# EAGLE board RTC (EAGLE 9.6.1)
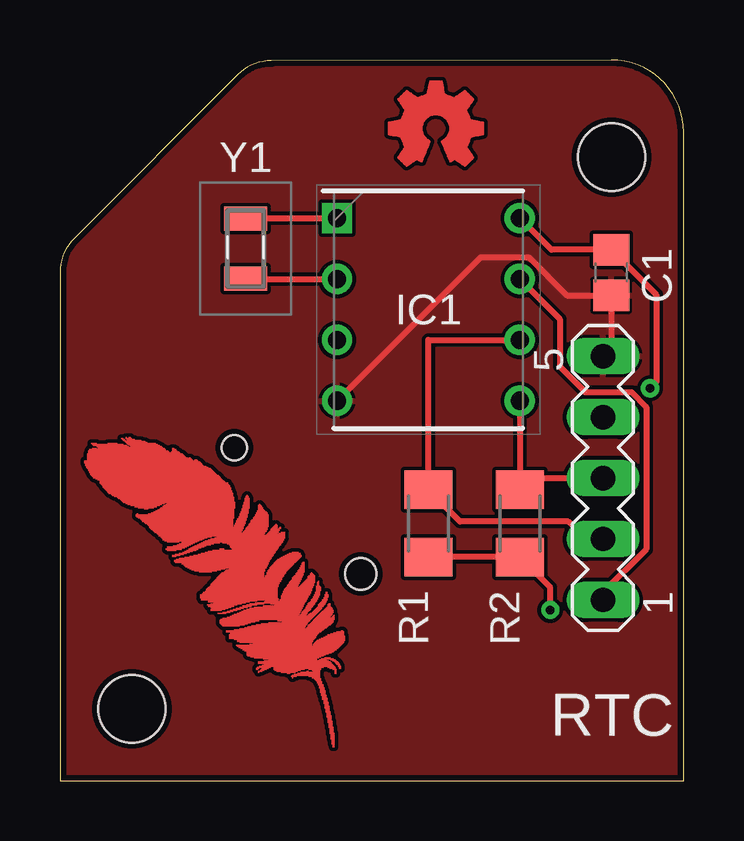
[diagram p0: board, top side]
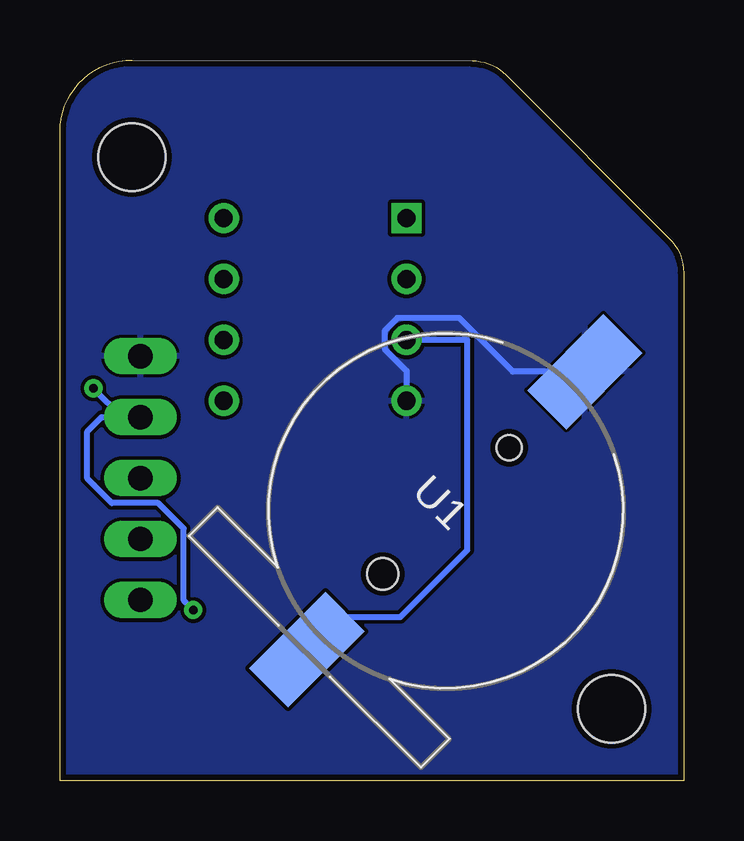
[diagram p1: board, bottom side, seen from below]

Size 26 x 30.05 mm. Coordinates in mm from the lower left corner, seen from the top.
Outline: 26,0 26,27.05 arc90 22.99,30.05 8.81,30.02 arc45 7.4,29.43 0.58,22.6 arc45 0,21.19 0,0 26,0
Copper layers (1*16): Top 0.035mm / dielectric 1.5mm / Bottom 0.035mm
Design rules "default *": minimum track width 6mil, minimum drill 0.35mm, track to track 6mil, track to pad 6mil, pad to pad 6mil, via to via 6mil, smd to smd 6mil, copper to edge 10mil, drill to drill 6mil, minimum pad ring 10mil, minimum via ring 8mil, stop-mask expansion 4mil, vias tented up to drill 0mil, thermal gap 5mil
Holes 2.8 mm at 23,26 3,3

## Footprints (pad centres in the part's own frame; a part is rotated, then mirrored left to right if it is on the bottom)
C0805 = smd 1.3 x 1.5: 1 -0.95,0; 2 0.95,0
DIP762W56P254L938H457Q8N = drill 0.76 pad 1.16 square: 1 -3.81,3.81 | drill 0.76 pad 1.16: 2 -3.81,1.27; 3 -3.81,-1.27; 4 -3.81,-3.81; 5 3.81,-3.81; 6 3.81,-1.27; 7 3.81,1.27; 8 3.81,3.81
M1206 = smd 1.6 x 2: 1 -1.4,0; 2 1.4,0
MA05-1 = drill 1.016 long: 1 -5.08,0; 2 -2.54,0; 3 0,0; 4 2.54,0; 5 5.08,0
S8411-45R_1 = smd 2.3 x 4.5: 1 0,-8.2; 2 0,8.2 | hole 1.3: 0,-3.725 | hole 1.05: 0,3.725
CM7VT1A32768KHZ125PF10PPMTBQC = smd 1 x 1.8: 1 -1.25,0; 2 1.25,0

## Placement (x,y rotation side)
C1  0.1uF  [C0805]  22.98,21.19 90 top
IC1  DS1307N+  [DIP762W56P254L938H457Q8N]  15.36,19.65 0 top
R1  2.2K  [M1206]  15.36,10.73 90 top
R2  2.2K  [M1206]  19.17,10.73 90 top
SV1  [MA05-1]  22.64,12.62 90 top
U1  S8411-45R  [S8411-45R_1]  9.91,11.26 315 bottom
Y1  CM7V-T1A-32.768K-9PF-20PPM-TA-  [CM7VT1A32768KHZ125PF10PPMTBQC]  7.74,22.19 90 top

## Library data of the parts
C1 = rcl; SPICEPREFIX: C
IC1 = MouserUseful; DESCRIPTION: 64 x 8, Serial, I2C Real-Time Clock; HEIGHT: 4.572mm; MANUFACTURER_NAME: Maxim Integrated; MANUFACTURER_PART_NUMBER: DS1307N+; MOUSER_PART_NUMBER: 700-DS1307N; MOUSER_PRICE-STOCK: https://www.mouser.co.uk/ProductDetail/Maxim-Integrated/DS1307N%2b?qs=0Y9aZN%252BMVCUaDyAv0LKbtw%3D%3D
R1 R2 = rcl; SPICEPREFIX: R
SV1 = con-lstb; OC_FARNELL: unknown; OC_NEWARK: unknown
U1 = MouserUseful; DESCRIPTION: HARWIN - S8411-45R - HOLDER, COIN CELL, CR1220, FULL REEL; HEIGHT: mm; MANUFACTURER_NAME: HARWIN; MANUFACTURER_PART_NUMBER: S8411-45R; MOUSER_PART_NUMBER: 855-S8411-45R; MOUSER_PRICE-STOCK: https://www.mouser.co.uk/ProductDetail/Harwin/S8411-45R?qs=Qom7kyPojXY6B0JhnWxDgQ%3D%3D
Y1 = MouserUseful; DESCRIPTION: Crystals 32.768 kHz 9.0 pF +/-20 PPM AEC-Q200; HEIGHT: 0.65mm; MANUFACTURER_NAME: MICRO CRYSTAL; MANUFACTURER_PART_NUMBER: CM7V-T1A-32.768k-9pF-20PPM-TA-QA T3; MOUSER_PART_NUMBER: 428-201568-MG03; MOUSER_PRICE-STOCK: https://www.mouser.com/Search/Refine.aspx?Keyword=428-201568-MG03

## Nets
GND: C1.1 IC1.4 SV1.5 U1.2
N$1: IC1.1 Y1.2
N$2: IC1.2 Y1.1
SCL: IC1.6 R1.2 SV1.2
SDA: IC1.5 R2.2 SV1.3
SQW/OUT: IC1.7 SV1.1
VBAT: IC1.3 U1.1
VCC: C1.2 IC1.8 R1.1 R2.1 SV1.4

## Tracks (layer width: path | path; a pad name or v marks a point on that pad's centre or on a via)
GND
  Top 0.254: SV1.5 22.98,18.04 C1.1 21.14,20.24 19.55,21.83 17.55,21.83 IC1.4
  Bottom 0.254: U1.2 7.12,17.06 9.35,19.29 11.93,19.29 12.47,18.76 12.47,18 11.55,17.09 IC1.4
  pour Top: 0,30.08 26.07,30.08 26.07,0 0,0
  pour Bottom: 0,30.08 26.07,30.08 26.07,0 0,0
N$1
  Top 0.254: Y1.2 7.76,23.46 IC1.1
N$2
  Top 0.254: Y1.1 7.76,20.92 IC1.2
SCL
  Top 0.254: IC1.6 15.36,18.38 R1.2 16.68,10.81 21.19,10.81 21.92,10.08 SV1.2
SDA
  Top 0.254: IC1.5 R2.2 19.66,12.62 SV1.3
SQW/OUT
  Top 0.254: IC1.7 20.84,19.25 20.84,17.27 21.91,16.2 23.84,16.2 24.45,15.59 24.45,9.65 22.64,7.85 SV1.1
VBAT
  Bottom 0.254: U1.1 14.34,6.83 11.8,6.83 9.01,9.62 9.01,18.38 IC1.3
VCC  (via drill 0.35)
  Top 0.254: R1.1 R2.1 20.44,8.06 v20.44,7.12 | IC1.8 20.49,22.14 C1.2 24.86,20.27 24.86,16.61 v24.61,16.36
  Bottom 0.254: v20.44,7.12 20.84,7.52 20.84,10.51 21.91,11.58 23.84,11.58 24.86,12.6 24.86,14.57 24.27,15.16 SV1.4 23.41,15.16 v24.61,16.36
(copper drawn outside any net)
  shapes: Top area x1037

## Text on the board
tNames: RTC